# Altium PCB PCB7747.PcbDoc
Units mm, origin at the board's own origin, x right, y up, seen from the top; angles counter-clockwise.
Board outline 42.5 x 50 mm, 2 copper layers (Top Layer, Bottom Layer), stack 1.569 mm thick; 18 components, 14 nets, 45 pads, 0 vias.
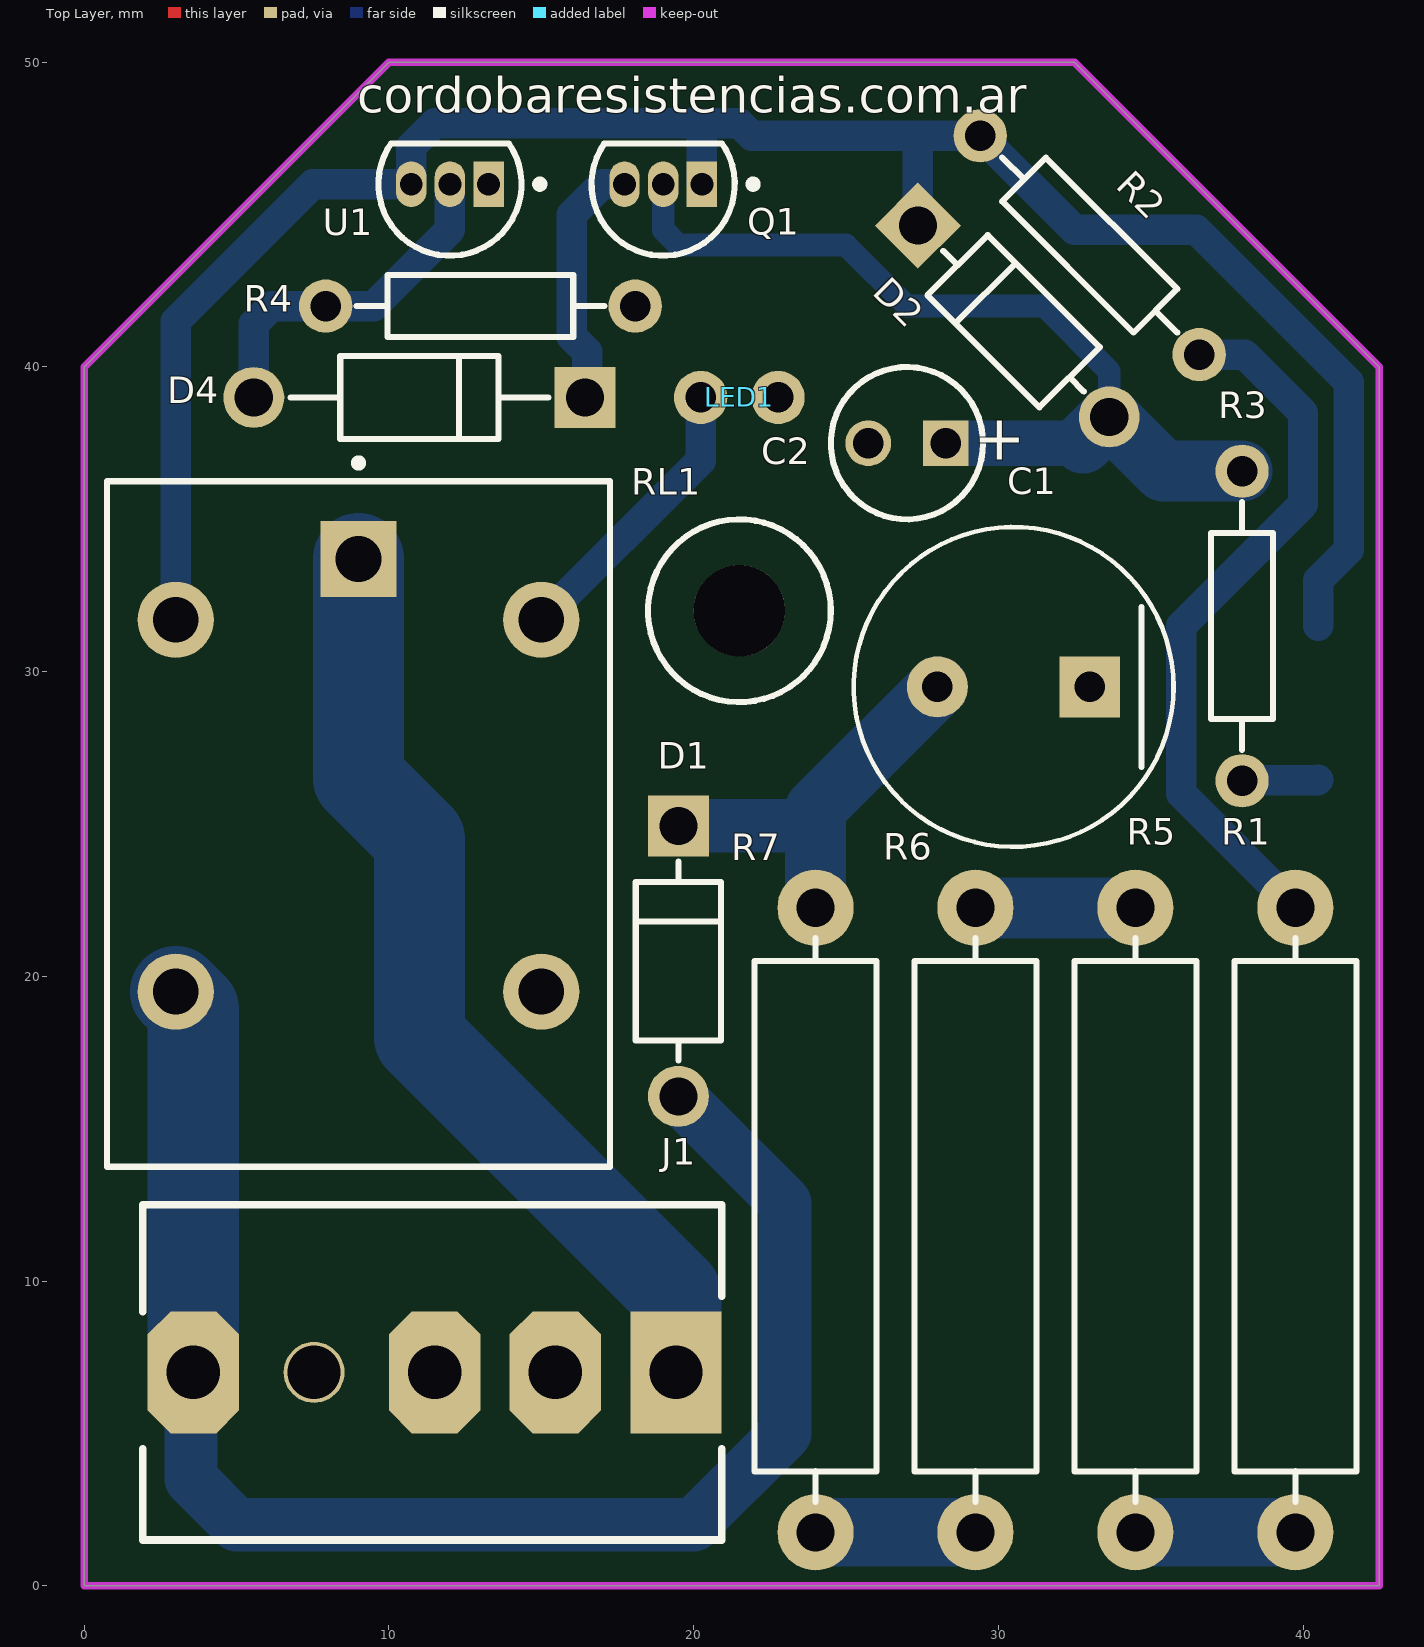
[diagram p0: Top Layer view]
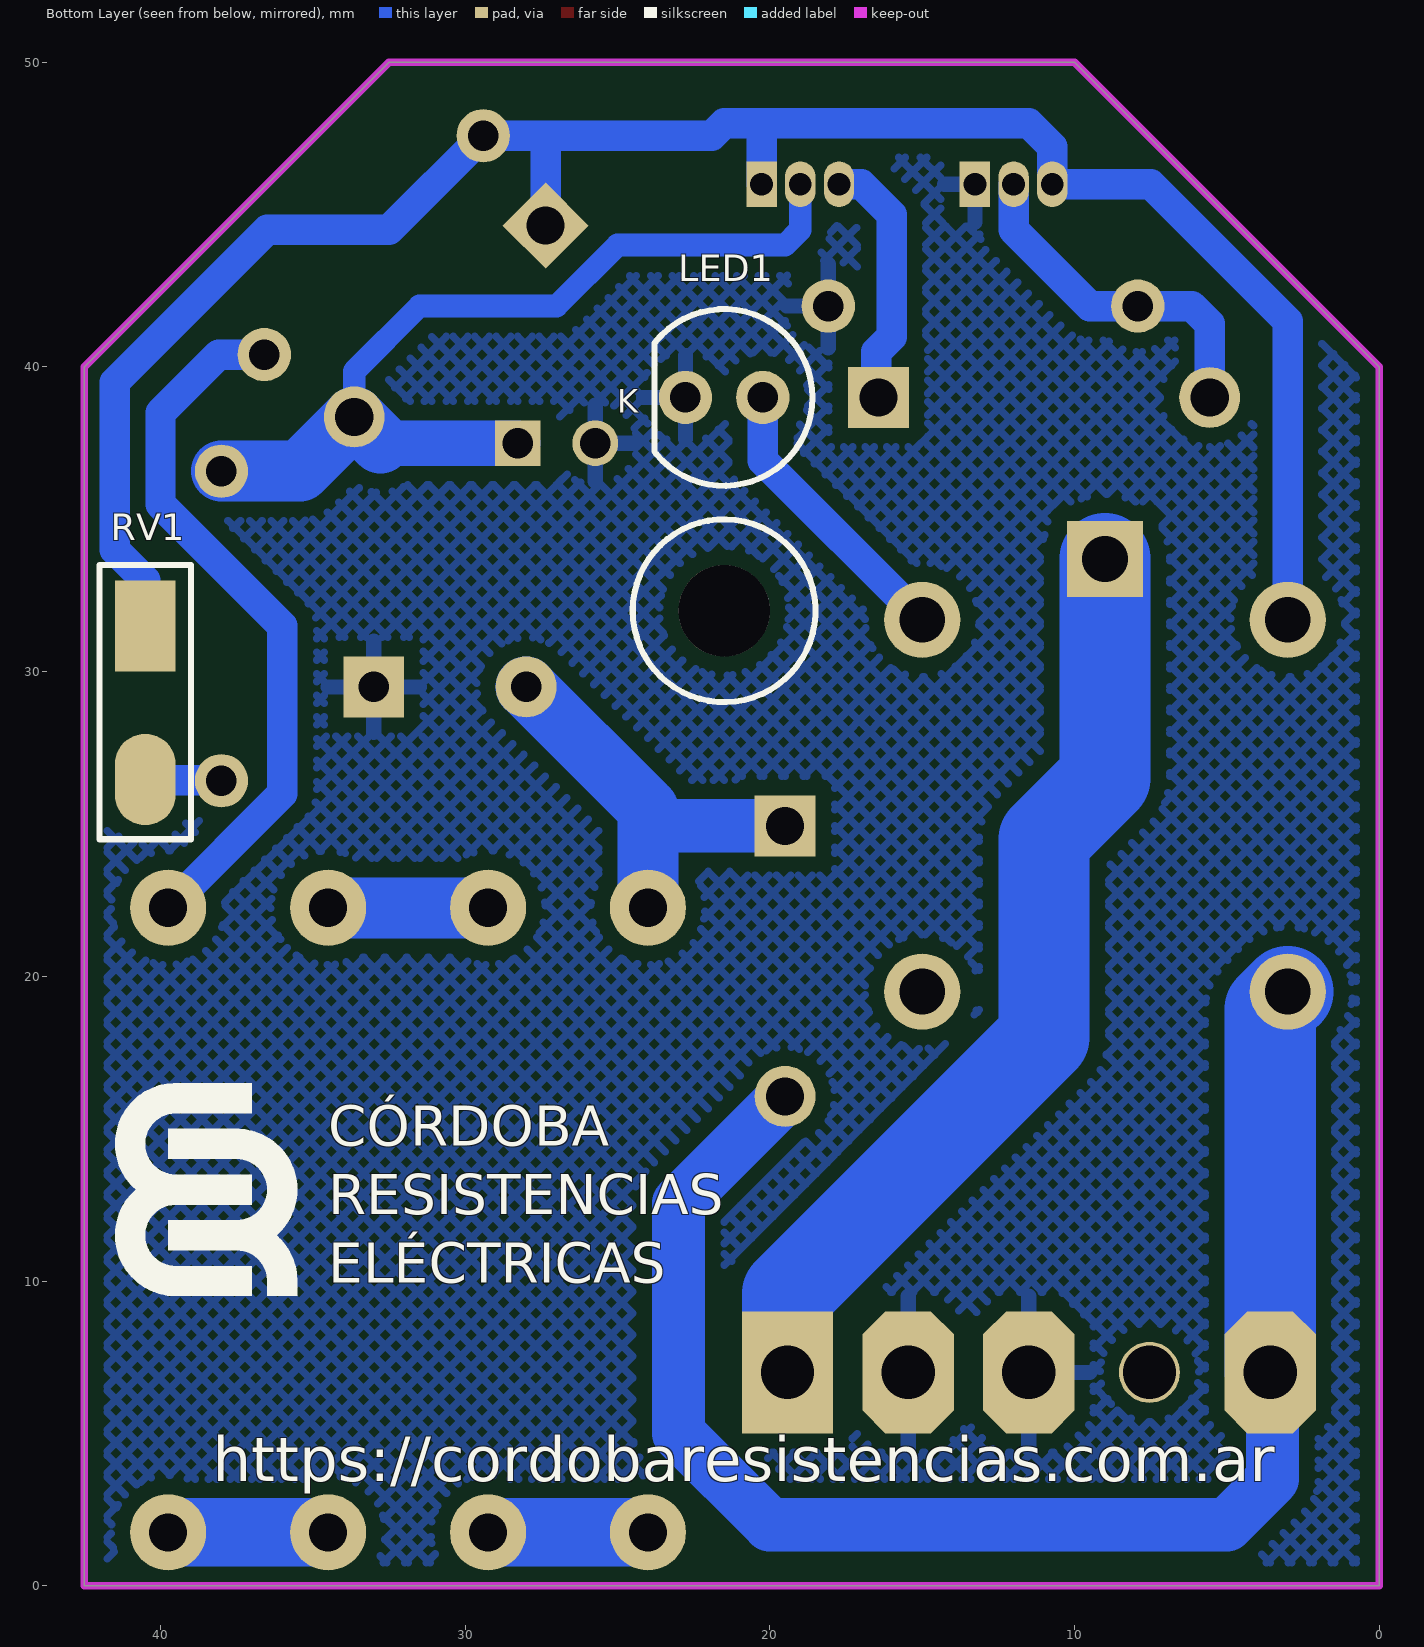
[diagram p1: Bottom Layer view, seen from below]
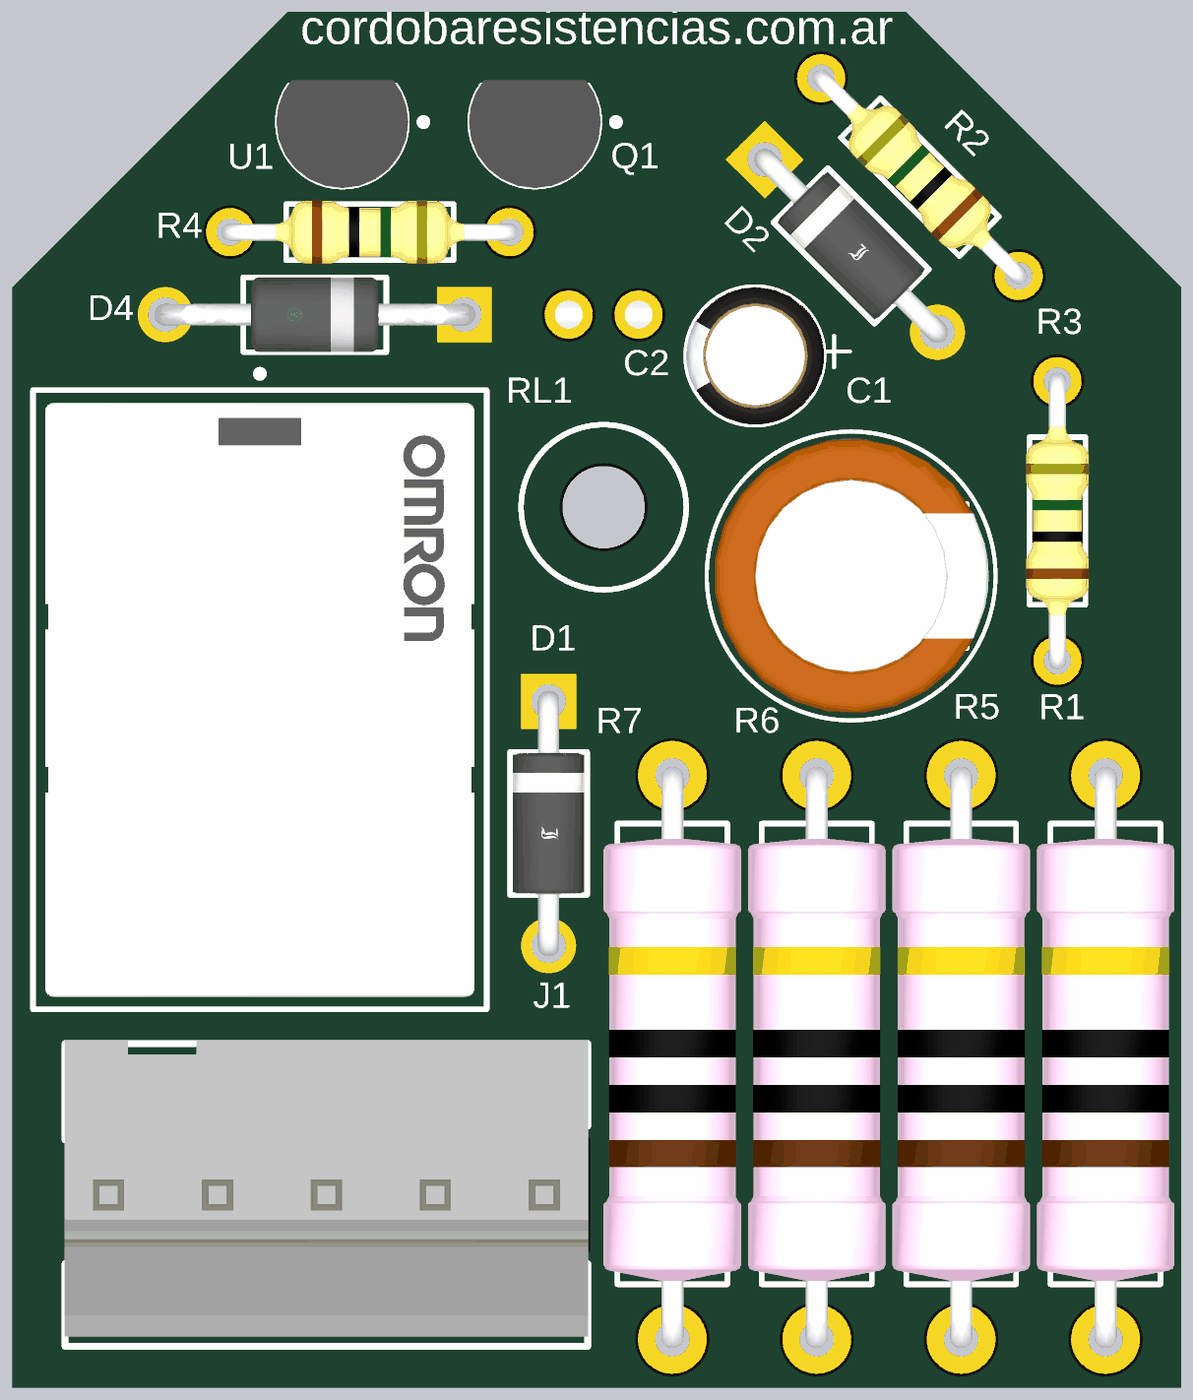
[diagram p2: 3D render of the assembled board from above, using the file's embedded part models]

## Layer stack, top to bottom
Top Solder: solder mask 0.0254, SM-001, Dk 4
Top Layer: signal copper 0.035
Dielectric 1: core 1.4986, Core-043, Dk 4.3
Bottom Layer: signal copper 0.035
Bottom Solder: solder mask 0.0254, SM-001, Dk 4

## Board outline
0,0 0,40 10,50 32.5,50 42.5,40 42.5,0

## Design rules (kind name [scope] priority, off if disabled: settings)
Clearance "Clearance Poly" [InPoly] p1: gap=0.5 ignorepadtopadclearanceinfootprint=FALSE
Clearance [All] p2: gap=0.254 ignorepadtopadclearanceinfootprint=FALSE except(0: Arc-Hole Track-Hole SMDPad-Hole THPad-Hole Via-Hole Fill-Hole Poly-Hole Region-Hole Text-Hole)
ComponentClearance ComponentClearanceResistors [InComponent('R1') or InComponent('R5') or InComponent('R6') or InComponent('R7')] p1: gap=0.1 collisioncheckmode=3 verticalgap=0.25 showdistances=FALSE
ComponentClearance [All] p2: gap=0.254 collisioncheckmode=3 verticalgap=0.254 showdistances=FALSE
PolygonConnect [All] p1: connectstyle=Relief reliefconductorwidth=0.5 reliefentries=4 polygonreliefangle="90 Angle" airgapwidth=0.5
RoomDefinition Main [InComponentClass('Main')] p1: confinementstyle=ConfineIn formatcopy=TRUE lockcomponents=FALSE outline 0,0 0,40 10,50 32.5,50 42.5,40 42.5,0
RoutingVias [All] p1: holewidth=0.711 width=1.27 viastyle="Through Hole" minholewidth=0.711 minwidth=1.27 maxholewidth=0.711 maxwidth=1.27
SolderMaskExpansion [All] p1: expansion=0.102 istentingtop=FALSE
Width [All] p1: maxlimit=5 minlimit=0.5 preferedwidth=1
29 further rules are at their usual default settings.

## Components (designator, comment, footprint, x,y, rotation, side; value= is the part's Value field where it differs from the comment)
C1 "UCY2W150MPD1TD" FP-UCY2W150MPD1TD-MFG 30.5,29.5 r180 top
C2 "ECA1HM100" CAPPR55-200-1100X500X1200 27,37.5 r180 top
D1 "1N4007" FP-1N4007-MFG 19.5,20.5 r270 top value=15pF
D2 "1N4007" FP-1N4007-MFG 30.5,41.5 r315 top value=15pF
D4 "1N4735A" FP-017AH-MFG 11,39 r180 top
J1 "09652058" 09652058 19.42,7 r180 top
LED1 "151051RS11000" "TYPE 5MM" 21.5,39 r0 top
Q1 "BC547B" ONSC-TO-92-3-29-11 19,46 r180 top
R1 "PR02000203901JA100" AXIAL-0.7 39.75,12 r90 top value=1K
R2 "SFR16S0004700JA500" AXIAL-0.4 33,44 r135 top value=470R
R3 "RNF14FTD47K0" AXIAL-0.4 38,31.5 r90 top value=47kR
R4 "SFR16S0002700JA500" AXIAL-0.4 13,42 r0 top value=270
R5 "PR02000203901JA100" AXIAL-0.7 34.5,12 r90 top value=1K
R6 "PR02000203901JA100" AXIAL-0.7 29.25,12 r90 top value=1K
R7 "PR02000203901JA100" AXIAL-0.7 24,12 r90 top value=1K
RL1 "G5LE-1-E DC24" FP-G5LE-1-E_DC24-MFG 9,25 r270 top
RV1 "200K" HDR1X2 40.5,29 r270 bottom
U1 "2N5064RLRAG" ONSC-TO-92-3-29-11 12,46 r180 top

## Footprints (in the part's own frame and the unit in brackets; to place one, negate y for a bottom-side part, rotate by r counter-clockwise, add the part's x,y. Pads: shape width x height; smd on the part's side, far side on the other; paste and mask are expansions set on the pad)
09652058 [mm] "SPOX and KK 396 Wire-to-Board Header, Vertical, with Friction Lock, 5 Circuits"
  rect 3x4 hole 1.75 unplated: 1(0,0)
  oct 3x4 hole 1.75 unplated: 2(3.96,0) 3(7.92,0) 5(15.84,0)
  round 2 hole 1.75 unplated: 4(11.88,0)
  silkscreen extent -1.5,-5.5 17.5,5.5, body extent -1.52,-5.6 17.52,5.15, height 13.85
AXIAL-0.4 [mm] "Axial Device, Thru-Hole; 2 Leads; 0.4 in Pin Spacing"
  round 1.75 hole 1: 1(-5.08,0) 2(5.08,0)
  silkscreen extent -4.06,-1.02 4.06,1.02, body extent -5.38,-1.16 5.38,1.16, height 3.93
AXIAL-0.7 [mm] "Axial Device, Thru-Hole; 2 Leads; 0.7 in Pin Spacing"
  round 2.5 hole 1.25: 1(-10.25,0) 2(10.25,0)
  silkscreen extent -9.25,-2 9.25,2, body extent -10.56,-2.5 10.56,2.5, height 7.5
CAPPR55-200-1100X500X1200 [mm] "THD, 2-Leads, Dia 5mm, Body Length 11mm"
  rect 1.5x1.5 hole 1: 1(-1.27,0)
  round 1.5 hole 1: 2(1.27,0)
  silkscreen extent -2.5,-2.5 2.5,2.5, body extent -2.53,-2.5 2.5,2.51, height 7.74
FP-1N4007-MFG [mm]
  rect 2x2 hole 1.25 paste-1000 mask+0: 1(-4.44,0)
  round 2 hole 1.25 paste-1000 mask+0: 2(4.44,0)
  silkscreen extent -3.26,-1.4 3.26,1.4, body extent -5.32,-1.5 5.32,1.5, height 0.25
FP-017AH-MFG [mm]
  rect 2x2 hole 1.25 paste-1000 mask+0: 1(-5.438,0)
  round 2 hole 1.25 paste-1000 mask+0: 2(5.438,0)
  silkscreen extent -4.24,-1.36 4.24,1.36, body extent -6.34,-1.46 6.34,1.46, height 0.25
FP-G5LE-1-E_DC24-MFG [mm]
  rect 2.5x2.5 hole 1.5 paste-1000 mask+0: 1(-8.7,0)
  round 2.5 hole 1.5 paste-1000 mask+0: 2(-6.7,-6) 3(5.5,-6) 4(5.5,6) 5(-6.7,6)
  silkscreen extent -11.97,-8.25 11.25,8.25, body extent -11.35,-8.35 11.35,8.35, height 0.25
FP-UCY2W150MPD1TD-MFG [mm]
  rect 2x2 hole 1 paste-1000 mask+0: 1(-2.5,0)
  round 2 hole 1 paste-1000 mask+0: 2(2.5,0)
  silkscreen extent -5.25,-5.25 5.25,5.25, body extent -5.35,-5.35 5.35,5.35, height 0.25
HDR1X2 [mm] "Connector; Header; 2 Position"
  rect 3x2 smd: 1(-2.5,0)
  oval 3x2 smd: 3(2.54,0)
  silkscreen extent -4.5,-1.5 4.5,1.5
ONSC-TO-92-3-29-11 [mm] "TO, 3-Leads, Body Dia 4.7mm, Pitch 1.27mm"
  rect 1x1.5 hole 0.75: 1(-1.27,0)
  oval 1x1.5 hole 0.75: 2(0,0) 3(1.27,0)
  silkscreen extent -3.08,-1.34 2.35,2.35, body extent -2.4,-1.53 2.4,2.4, height 9
"TYPE 5MM" [mm] "THT, LED-5mm, 2pin- Body 5.8mm"
  round 1.75 hole 1: 1(1.27,0) 2(-1.27,0)
  body extent -2.9,-2.9 2.5,2.9, height 23.6

## Part data
C1: library part CMP-12462-000049-1, "CAP ALUM 15UF 20% 450V RADIAL", Capacitance=15uF, Case/Package=Radial, Max Operating Temperature=105°C, Min Operating Temperature=-25°C, Package Quantity=500, Ripple Current=185mA, Tolerance=20%, Voltage Rating=450V, Height - Seated (Max)=1.043inch, Lead Pitch=0.197inch, Life (Hours)=12000Hour, Mount="Through Hole", Packaging="Tape and Reel"
C2: library part CMP-1665-00038-2, "Aluminum Electrolytic Capacitor, 10 uF, +/- 20%, 50 V, -40 to 85 degC, 2-Pin THD, RoHS, Bulk", Capacitance=10uF, Case/Package=Radial, Dielectric Material=Aluminium, Leakage Current=3uA, Manufacturer=Panasonic, Max Operating Temperature=85degC, Min Operating Temperature=-40degC, Package Description="2-Pin Radial Lead, Dia 5 mm, Height 12 mm", Package Quantity=200, Package Reference=CAPPR55-200-1100X500X1200, Ripple Current=65mA, Tolerance=20%, Voltage=50V, Datasheet URL=https://industrial.panasonic.com/cdbs/www-data/pdf/RDF0000/ABA0000C1218.pdf, Datasheet Version="Rev. 05, 10/2016", Diameter=5mm, Dissipation Factor=0.12%, Height=11mm, Height - Seated (Max)=0.472inch, Lead Diameter=0.5mm, Lead Free=LeadFree, Lead Pitch=2mm, Lead/Base Style=Straight, Length=11mm, Life (Hours)=2000Hour, Manufacturer URL=http://www.panasonic.com/, Mount=ThroughHole, Number of Pins=2, Packaging=Bulk, Radiation Hardening=No, REACH SVHC=NoSVHC, Ripple Current (AC)=65mA, RoHSCompliant=true, Termination=Radial, Voltage Rating=50V, Voltage Rating (DC)=50V
D1 D2: library part CMP-123542-000001-1, "Rectifier diode 1000 V 1 A DO-41, ,", Capacitance=15pF, Forward Current=1A, Manufacturer=Diotec, Max Junction Temp=+175°C, Max Repetitive Reverse Voltage=1000V, Max Surge Forward Current=27A, Peak Reverse Current=5uA, Temperature="-50°C to +175°C", Temperature Range Low=-50°C, Automotive=No, Category=Diode, ComponentLink2Description=Datasheet, ComponentLink2URL=https://datasheet.octopart.com/1N4007-Diotec-datasheet-62346875.pdf, Device Class L1="Discrete Semiconductors", Device Class L2=Diodes, Device Class L3="Rectifier Diodes", Height=2.8mm, Ipc Land Pattern Name=DIOAD888W100L520D280, Lead Free=Yes, Manufacturer Part Number=1N4007, Octopart=https://octopart.com/1n4007-diotec-4040411, Package=1N4007, Reverse Voltage=1000V, RoHS=TRUE, Temperature Range High=+175°C
D4: library part CMP-0892-00008-2, "DIODE ZENER 6.2V 1W DO41", Manufacturer="ON Semiconductor", Max Junction Temp=+200°C, Max Reverse Leakage Current=10uA, Max Zener Voltage=6.51V, Nom Zener Voltage=6.2V, Package=017AH, Power Dissipation=1W, Reverse Voltage=3V, Temperature="-65°C to +200°C", Temperature Range Low=-65°C, Automotive=No, Category=Diode, ComponentLink2Description=Datasheet, ComponentLink2URL=https://www.onsemi.cn/PowerSolutions/document/1N4736AT-D.PDF, Device Class L1="Discrete Semiconductors", Device Class L2=Diodes, Device Class L3="Zener Diodes", Digikey Description="DIODE ZENER 6.2V 1W DO41", Footprint Url=https://www.onsemi.com/pub/Collateral/017AH.PDF, Height=2.72mm, Ipc Land Pattern Name=DIOPA1088W105L520D272, Lead Free=Yes, Manufacturer Part Number=1N4735A, Mouser Description="Zener Diodes 6.2V 1W ZENER 5%", Octopart=https://octopart.com/1n4735a-on+semiconductor-3533934, RoHS=TRUE, Temperature Range High=+200°C, Zener Impedance=2Ω
J1: "SPOX™ and KK® 396 Wire-to-Board Header, Vertical, with Friction Lock, 5 Circuits", Contact Resistance=10mR, Current Rating=7A, Housing Color=Natural, Manufacturer=Molex, Manufacturer Part Number=09-65-2058, Max Operating Temperature=105°C, Max Voltage Rating (AC)=250V, Min Operating Temperature=-40°C, Package Quantity=4000, Supplier Part Number 1=6705243, Category="Headers and Wire Housings", ComponentLink1Description=https://datasheet.ciiva.com/5162/0009652058-pcb-headers-131639-5162529.pdf?src-supplier=Mouser, ComponentLink1URL=https://datasheet.ciiva.com/5162/0009652058-pcb-headers-131639-5162529.pdf?src-supplier=Mouser, ComponentLink2Description=https://datasheet.ciiva.com/27055/1961065-27055322.pdf?src-supplier=Jameco, ComponentLink2URL=https://datasheet.ciiva.com/27055/1961065-27055322.pdf?src-supplier=Jameco, ComponentLink3Description=https://datasheet.ciiva.com/30153/50910009652058-pcb-headers-30153267.pdf?src-supplier=Onlinecomponents.com, ComponentLink3URL=https://datasheet.ciiva.com/30153/50910009652058-pcb-headers-30153267.pdf?src-supplier=Onlinecomponents.com, ComponentLink4Description=https://datasheet.ciiva.com/11747/0900766b80d59e72-11747383.pdf?src-supplier=RSComponents, ComponentLink4URL=https://datasheet.ciiva.com/11747/0900766b80d59e72-11747383.pdf?src-supplier=RSComponents, ComponentLink5Description=https://datasheet.ciiva.com/9468/0009652058-pcb-headers-9468429.pdf?src-supplier=Avnet, ComponentLink5URL=https://datasheet.ciiva.com/9468/0009652058-pcb-headers-9468429.pdf?src-supplier=Avnet, ComponentLink6Description=https://datasheet.ciiva.com/49274/523830-49274679.pdf?src-supplier=Jameco, ComponentLink6URL=https://datasheet.ciiva.com/49274/523830-49274679.pdf?src-supplier=Jameco, Contact Material=Brass, Contact Plating=Tin,Copper, Depth=10.75mm, Gender=Male, Height=13.85mm, Housing Material=Nylon, Lead Free="Lead Free", Length=19.04mm, Max Current Rating=7A, Mount="Through Hole", Number Of Contacts=5, Number of Positions=5, Number of Rows=1, Orientation=Straight, Packaging=Bag, Pitch=3.96mm, Pricing 1="10=0.44700, 200=0.37700, 750=0.32200, 3000=0.27000, 6000=0.22800 (USD)", Radiation Hardening=No, REACH SVHC=Unknown, RoHS=Yes, RoHS Compliant=Yes, Series=5273, Stock 1=380, Supplier 1=RSComponents, Termination=Solder, Voltage Rating=250V, Voltage Rating (DC)=250V
LED1: library part CMP-1488-00008-1, "THT LED round mono-color color lens, WL-TMRW, Red", Emitting color=Red, Manufacturer="Wuerth Elektronik", ComponentLink1Description="Manufacturer URL", ComponentLink1URL=http://www.we-online.com, ComponentLink2Description=Datasheet, ComponentLink2URL=http://katalog.we-online.de/pbs/datasheet/7448042001.pdfhttp://katalog.we-online.de/pbs/datasheet/7448042001.pdfhttp://katalog.we-online.de/pbs/datasheet/7448042001.pdfhttp://katalog.we-online.de/pbs/datasheet/151051RS11000.pdf, PackageReference="Type 5mm", PartNumber=151051RS11000
Q1: library part CMP-1048-01437-1, "Amplifier Transistor, NPN Silicon, 3-Pin TO-92, Bulk Box", Manufacturer="On Semiconductor", PartNumber=BC547C, ComponentLink1Description="Manufacturer URL", ComponentLink1URL=http://www.onsemi.com/, ComponentLink2Description=Datasheet, ComponentLink2URL=http://www.onsemi.com/pub_link/Collateral/BC546-D.PDF, ComponentLink3Description="Package Specification", ComponentLink3URL=http://www.onsemi.cn/pub_link/Collateral/2N6426-D.PDF, DatasheetVersion="Rev. 7", fT Min (MHz)=150, IC Continuous (A)=0.1, Mounting Technology="Through Hole", PackageDescription="3-Pin Transistor Outline, Body 4.825 x 3.685 mm, Pitch 1.27 mm", PackageReference=TO-92-3-29-11_AM_SL, PackageVersion="Rev. AM", Packing="Bulk Box", Polarity=NPN, RoHS=FALSE
R1 R5 R6 R7: library part Res2, "PR02 Series Axial Metal Film Resistor 3.9kOhms +/-5% 2W +/-250ppm/degC", Case/Package=Conformal, Manufacturer=Vishay, Max Operating Temperature=155°C, Min Operating Temperature=-55°C, Operating Supply Voltage=500V, Power Rating=2W, Resistance=3.9kR, Resistor Type="Metal Film", Supplier Part Number 1=BC4797CT-ND, Temperature Coefficient=250ppm/°C, Tolerance=5%, Category="Through-Hole Resistors", ComponentLink1Description=https://datasheet.ciiva.com/15158/getdatasheetpartid-101804-15158417.pdf?src-supplier=Verical, ComponentLink1URL=https://datasheet.ciiva.com/15158/getdatasheetpartid-101804-15158417.pdf?src-supplier=Verical, ComponentLink2Description=https://datasheet.ciiva.com/11826/0900766b80d9a182-11826978.pdf?src-supplier=RSComponents, ComponentLink2URL=https://datasheet.ciiva.com/11826/0900766b80d9a182-11826978.pdf?src-supplier=RSComponents, ComponentLink3Description=https://datasheet.ciiva.com/48426/pr01-02-03-eng-tds-48426105.pdf?src-supplier=Distrelec, ComponentLink3URL=https://datasheet.ciiva.com/48426/pr01-02-03-eng-tds-48426105.pdf?src-supplier=Distrelec, Construction=Cylindrical, Contact Plating=Tin, Diameter=3.9mm, LatestRevisionDate=17-Jul-2002, LatestRevisionNote="Re-released for DXP Platform.", Lead Free="Lead Free", Length=12mm, Manufacturer Part Number=PR02000203901JA100, Military Standard=Not, Mount="Through Hole", PackageDescription="Axial Device, Thru-Hole; 2 Leads; 0.4 in Pin Spacing", PackageReference=AXIAL-0.4, Packaging="Ammo Pack", Pricing 1="1=0.40000, 10=0.31000, 25=0.23640, 50=0.17560, 100=0.13050, 250=0.11024, 500=0.09450 (USD)", Published=8-Jun-2000, Publisher="Altium Limited", Radiation Hardening=No, RoHS=Yes, RoHS Compliant=Yes, Series=PR02, Stock 1=9592, Supplier 1=Digi-Key, Technology="METAL FILM", Termination=Axial, Width=3.9mm
R2: library part Res2, "470 Ohms ±5% 0.5W, 1/2W Through Hole Resistor Axial - Metal Film", Case/Package=Conformal, Manufacturer="Vishay BCcomponents", Max Operating Temperature=155°C, Max Power Dissipation=500mW, Min Operating Temperature=-55°C, Resistance=470R, Resistance Tolerance=5%, Resistor Type="Metal Film", Supplier Part Number 1=BC4327CT-ND, Temperature Coefficient=100ppm/°C, Voltage Rating=200V, Category="Through-Hole Resistors", ComponentLink1Description=https://datasheet.ciiva.com/8397/sfr16s25-8397288.pdf?src-supplier=Avnet, ComponentLink1URL=https://datasheet.ciiva.com/8397/sfr16s25-8397288.pdf?src-supplier=Avnet, ComponentLink2Description=https://datasheet.ciiva.com/7851/572067-7851837.pdf?src-supplier=Element14, ComponentLink2URL=https://datasheet.ciiva.com/7851/572067-7851837.pdf?src-supplier=Element14, Construction=Cylindrical, Contact Plating=Tin, Diameter=1.9mm, LatestRevisionDate=17-Jul-2002, LatestRevisionNote="Re-released for DXP Platform.", Lead Diameter=0.45mm, Lead Length=26mm, Length=4.1mm, Manufacturer Part Number=SFR16S0004700JA500, Military Standard=Not, Number of Terminations=2, PackageDescription="Axial Device, Thru-Hole; 2 Leads; 0.4 in Pin Spacing", PackageReference=AXIAL-0.4, Packaging="Tape and Reel", Power Rating=500mW, Pricing 1="1=0.15000, 10=0.12400, 25=0.09040, 50=0.06560, 100=0.04860, 250=0.03728, 500=0.02938, 1000=0.02034 (USD)", Published=8-Jun-2000, Publisher="Altium Limited", Radiation Hardening=No, REACH SVHC=Unknown, RoHS=Yes, RoHS Compliant=Yes, Series=SFR16S, Stock 1=23287, Supplier 1=Digi-Key, Termination=Axial, Tolerance=5%
R3: library part Res2, "Res Metal Film 47K Ohm 1% 1/4W ±100ppm/°C Conformal AXL Thru-Hole T/R", Case/Package=Conformal, Manufacturer="Stackpole Electronics", Max Operating Temperature=155°C, Max Power Dissipation=250mW, Min Operating Temperature=-55°C, Package Quantity=1, Resistance=47kR, Resistor Type="Metal Film", Supplier Part Number 1=RNF14FTD47K0CT-ND, Temperature Coefficient=100ppm/°C, Tolerance=1%, Category="Through-Hole Resistors", ComponentLink1Description=http://components.arrow.com/part/dataview/46839537S9856773N1174?src-supplier=Arrow+Electronics, ComponentLink1URL=http://components.arrow.com/part/dataview/46839537S9856773N1174?src-supplier=Arrow+Electronics, ComponentLink2Description=https://www.seielect.com/Catalog/SEI-RNF_RNMF.pdf?src-supplier=Digi-Key, ComponentLink2URL=https://www.seielect.com/Catalog/SEI-RNF_RNMF.pdf?src-supplier=Digi-Key, ComponentLink3Description=https://www.seielect.com/Catalog/SEI-RNF_RNMF.pdf?src-supplier=Avnet, ComponentLink3URL=https://www.seielect.com/Catalog/SEI-RNF_RNMF.pdf?src-supplier=Avnet, ComponentLink4Description=http://www.seielect.com/Catalog/SEI-RNF_RNMF.pdf?src-supplier=Future+Electronics, ComponentLink4URL=http://www.seielect.com/Catalog/SEI-RNF_RNMF.pdf?src-supplier=Future+Electronics, Construction=Cylindrical, Contact Plating=Copper,Tin, Diameter=2.35mm, Features="Flame Retardant Coating", LatestRevisionDate=17-Jul-2002, LatestRevisionNote="Re-released for DXP Platform.", Lead Free="Lead Free", Length=6.35mm, Manufacturer Part Number=RNF14FTD47K0, Mount="Through Hole,Axial", Number of Terminations=2, PackageDescription="Axial Device, Thru-Hole; 2 Leads; 0.4 in Pin Spacing", PackageReference=AXIAL-0.4, Packaging="Tape and Reel", Power Rating=250mW, Pricing 1="1=0.10000, 10=0.06500, 25=0.04480, 50=0.03500, 100=0.02500, 250=0.01952, 500=0.01550, 1000=0.01100 (USD)", Published=8-Jun-2000, Publisher="Altium Limited", Radiation Hardening=No, RoHS=Yes, RoHS Compliant=Yes, Series=RN, Stock 1=20607, Supplier 1=Digi-Key, Termination=Axial
R4: library part Res2, "VISHAY         SFR16S0002700JA500             Through Hole Resistor, 270 ohm, 200 V, Axial Leaded, 500 mW,  5%, SFR16S Series", Case/Package=Conformal, Manufacturer="Vishay BCcomponents", Max Operating Temperature=155°C, Max Power Dissipation=500mW, Min Operating Temperature=-55°C, Resistance=270R, Resistance Tolerance=5%, Resistor Type="Metal Film", Supplier Part Number 1=BC4316CT-ND, Temperature Coefficient=100ppm/°C, Voltage Rating=200V, Category="Through-Hole Resistors", ComponentLink1Description=https://datasheet.ciiva.com/7851/572067-7851822.pdf?src-supplier=Element14, ComponentLink1URL=https://datasheet.ciiva.com/7851/572067-7851822.pdf?src-supplier=Element14, Construction=Cylindrical, Contact Plating=Tin, Diameter=1.9mm, LatestRevisionDate=17-Jul-2002, LatestRevisionNote="Re-released for DXP Platform.", Lead Diameter=0.45mm, Lead Length=26mm, Length=4.1mm, Manufacturer Part Number=SFR16S0002700JA500, Military Standard=Not, Number of Terminations=2, PackageDescription="Axial Device, Thru-Hole; 2 Leads; 0.4 in Pin Spacing", PackageReference=AXIAL-0.4, Packaging="Ammo Pack", Power Rating=500mW, Pricing 1="1=0.15000, 10=0.12400, 25=0.09040, 50=0.06560, 100=0.04860, 250=0.03728, 500=0.02938, 1000=0.02034 (USD)", Published=8-Jun-2000, Publisher="Altium Limited", Radiation Hardening=No, REACH SVHC=Unknown, RoHS=Yes, RoHS Compliant=Yes, Series=SFR16S, Stock 1=4317, Supplier 1=Digi-Key, Termination=Axial, Tolerance=5%
RL1: library part CMP-08822-000256-1, "RELAY GEN PURPOSE SPDT 16A 24V", Coil Current=16.7mA, Coil Power=400mW, Coil Resistance=1.44kR, Coil Voltage (DC)=24V, Contact Current Rating=16A, Max Operating Temperature=85°C, Max Voltage Rating (AC)=250V, Min Operating Temperature=-40°C, Package Quantity=500, Application(s)=POWER, Coil Type=Non-Latching, Contact Material=Tin, Depth=16.5mm, Height=19mm, Lead Free="Lead Free", Length=22.5mm, Life (Hours)=1000000Hour, Max Current Rating=16A, Mount="Through Hole", Number of Pins=5, Operate Time=10ms, Packaging=Tray, Power Consumption=400mW, Radiation Hardening=No, Relay Type="General Purpose", Release Time=5ms, Series=G5LE-E, Termination="PC Pin", Throw Configuration=SPDT, Width=16.5mm
RV1: library part RPot, "P160 Series 200 kOhm ±20 % Panel Mount Multi-Turn Potentiometer", Manufacturer="TT BI", Manufacturer Part Number=P160KNP-0QC15B200K, Max Power Dissipation=200mW, Package Quantity=300, Resistance=200kR, Resistor Type="Conductive Plastic", Supplier Part Number 1=987-1732-ND, Tolerance=20%, Actuator Diameter=0.236inch, Actuator Length=0.591inch, Category=Uncategorized, ComponentLink1Description=https://datasheet.ciiva.com/4992/p160-20748-4992393.pdf?src-supplier=Mouser, ComponentLink1URL=https://datasheet.ciiva.com/4992/p160-20748-4992393.pdf?src-supplier=Mouser, LatestRevisionDate=17-Jul-2002, LatestRevisionNote="Re-released for DXP Platform.", Lead Free="Lead Free", Mount=Panel, Number of Gangs=1, Number of Turns=1, PackageDescription="Variable Resistor, Thru-Hole; 3 Leads", PackageReference=VR5, Packaging=Tray, Power Rating=200mW, Pricing 1="1=0.85000, 10=0.75000, 25=0.67520, 40=0.65000, 80=0.62500, 230=0.58748, 440=0.50000, 1100=0.46250, 5500=0.38000 (USD)", Published=8-Jun-2000, Publisher="Altium Limited", RoHS=Yes, RoHS Compliant=Yes, Series=P160, Set Position=0.5, Sim Note="Enter the Resistance value and the set point into parameter fields.", Stock 1=1002, Supplier 1=Digi-Key, Taper=Linear, Termination=Solder
U1: library part CMP-1068-00148-1, "Sensitive Gate Silicon Controlled Rectifier, Reverse Blocking Thyristor, 3-Pin TO-92, Pb-Free, Tape and Reel", Manufacturer="On Semiconductor", ComponentLink1Description="Manufacturer URL", ComponentLink1URL=http://www.onsemi.com/, ComponentLink2Description=Datasheet, ComponentLink2URL=http://www.onsemi.cn/pub_link/Collateral/2N5060-D.PDF, ComponentLink3Description="Package Specification", ComponentLink3URL=http://www.onsemi.cn/pub_link/Collateral/2N6426-D.PDF, DatasheetVersion="Rev. 10", IT(RMS) Max (A)=0.8, ITSM Max (A)=10, Mounting Technology="Through Hole", PackageDescription="3-Pin Transistor Outline, Body 4.825 x 3.685 mm, Pitch 1.27 mm", PackageReference=TO-92-3-29-11_AM_SL, PackageVersion="Rev. AM", Packing="Tape and Reel", PartNumber=2N5064RLRAG, RoHS=Pb-Free

## Free pads (board coordinates)
  round 3 hole 3 unplated: H(21.5,32)

## Nets (pads, with @x,y where several pads share a name; then routed paths per layer and width w, separated by ;. In a path a pad name is that pad's centre, name@x,y a point inside that pad or via, vN(x,y) a via of type N, cw(c..) or ccw(c..) an arc to the next point about the centre after c; other vN are vias at no path point)
+VCC: D1.2 J1.5 RL1.3 | length 50.1
  Bottom Layer w1.75: J1.5 3.5,6.92 3.5,3.5 5,2 20,2 23,5 23,12.56 D1.2
  Bottom Layer w3: RL1.3 3.58,18.92 J1.5
GND: C1.1 C2.2 J1.2 J1.3 LED1.1 R4.2 U1.1
NetC1_2: C1.2 D1.1 R7.2 | length 12.7
  Bottom Layer w1.75: D1.1 23.44,24.94
  Bottom Layer w2: R7.2 24,25.5 ; 24.096,25.596 C1.2
NetC2_1: C2.1 D2.2 Q1.2 R3.2 | length 30.4
  Bottom Layer w0.75: Q1.2 19,44.5 19.5,44 25,44 27,42 31.5,42 33.64,39.86 D2.2
  Bottom Layer w1.5: C2.1 32.779,37.5
  Bottom Layer w2: 32.779,37.5 D2.2 35.42,36.58 R3.2
NetD2_1: D2.1 Q1.1 R2.2 RL1.2 RV1.1 U1.3 | length 68.5
  Bottom Layer w1: RL1.2@3,31.907 3,41.5 7.5,46 U1.3 10.73,47.23 11.5,48 20.5,48 ; Q1.1 20.27,47.77 20.5,48 ; D2.1 27.36,47.453 27.5,47.592 ; RV1.1 40.5,33 41.5,34 41.5,39.5 36.5,44.5 32.5,44.5 R2.2 27.5,47.592 ; 20.5,48 21.5,48 21.908,47.592 27.5,47.592
NetD4_1: D4.1 Q1.3 | length 8.4
  Bottom Layer w1: D4.1 16.5,39.062 16.5,40.5 16,41 16,45 17,46 Q1.3
NetD4_2: D4.2 R4.1 U1.2 | length 11.6
  Bottom Layer w1: D4.2 5.562,41.414 6.148,42 R4.1 9.5,42 12,44.5 U1.2
NetJ1_1: J1.1 RL1.1 | length 31
  Bottom Layer w3: RL1.1 9,26.5 11,24.5 11,18 19.42,9.58 J1.1
NetLED1_2: LED1.2 RL1.5 | length 9.5
  Bottom Layer w1: RL1.5 20.23,36.93 LED1.2
NetR1_1: R1.1 R5.1 | length 5.2
  Bottom Layer w2.25: R5.1 R1.1
NetR1_2: R1.2 R2.1 | length 23.7
  Bottom Layer w1: R2.1 38.092,40.408 40,38.5 40,35.5 36,31.5 36,26 R1.2
NetR3_1: R3.1 RV1.3 | length 2.5
  Bottom Layer w1: R3.1 38.02,26.44 40.48,26.44 RV1.3
NetR5_2: R5.2 R6.2 | length 5.2
  Bottom Layer w2: R6.2 R5.2
NetR6_1: R6.1 R7.1 | length 5.2
  Bottom Layer w2.25: R7.1 R6.1
pads on no net: J1.4 RL1.4

## Polygon pours and split planes (outlines as drawn)
GND on Bottom Layer "GND_L02_P000" (hatched 45Degree grid 0.5 track 0.25, remove dead copper, pour order 0): 10,50 32.5,50 42.5,40 42.5,0 0,0 0,40

## Keep-outs
Keep-Out Layer:
  the board outline again, w0.25

## Silkscreen, mask and mechanical layers (free items; w line width, h text height)
Top Overlay:
  circle w0.2: c21.5,32 r3
  text "cordobaresistencias.com.ar" at 8.956,47.951 h2
Bottom Overlay:
  circle w0.2: c21.5,32 r3
  region: 35.5,10 35.5,9.5 36.5,9.5 36.5,10
  rectangle: 38.75,11 39.75,12
  rectangle: 38.75,14 39.75,15
  region: 38,16.5 37,16.5 37,15.5 38,15.5
  region: 38,13.5 37,13.5 37,12.5 38,12.5
  region: 38,10.5 37,10.5 37,9.5 38,9.5
  lines w1: 36,10 cw(c37.5,10) 37.5,11.5 ; 38,10 39.5,10 ccw(c39.5,11.5) 39.5,13 ; 38,13 39.5,13 ; 38,16 39.5,16 cw(c39.5,14.5) 39.5,13 ; 39,11.5 37.5,11.5 ; 39,14.5 37.5,14.5 ccw(c37.5,13) 37.5,11.5 ; 39.5,13 39.5,13
  text "CÓRDOBA / RESISTENCIAS / ELÉCTRICAS" at 34.5,9.5 h2.25
  text "https://cordobaresistencias.com.ar" at 38.286,2.951 h2.5
Bottom Assembly:
  region: 26.856,12.532 26.856,12.329 26.856,12.126 27.059,12.126 27.059,12.329 27.059,12.532 27.059,12.735 26.856,12.735

## Dimensions
0,0 to 10,50 on Top Courtyard
0,0 to 0,40 on Top Courtyard
0,0 to 42.5,0 on Top Courtyard

## Text inside footprints (layer, text, board x,y; h text height)
C2: Top Overlay "+" at 30.908,38.237 h1.5 r180
LED1: Bottom Courtyard "K" at 24.548,39.381 h0.76 r180; Bottom Overlay "K" at 25,38.5 h0.76